# Allegro board rp2040miniboard.brd
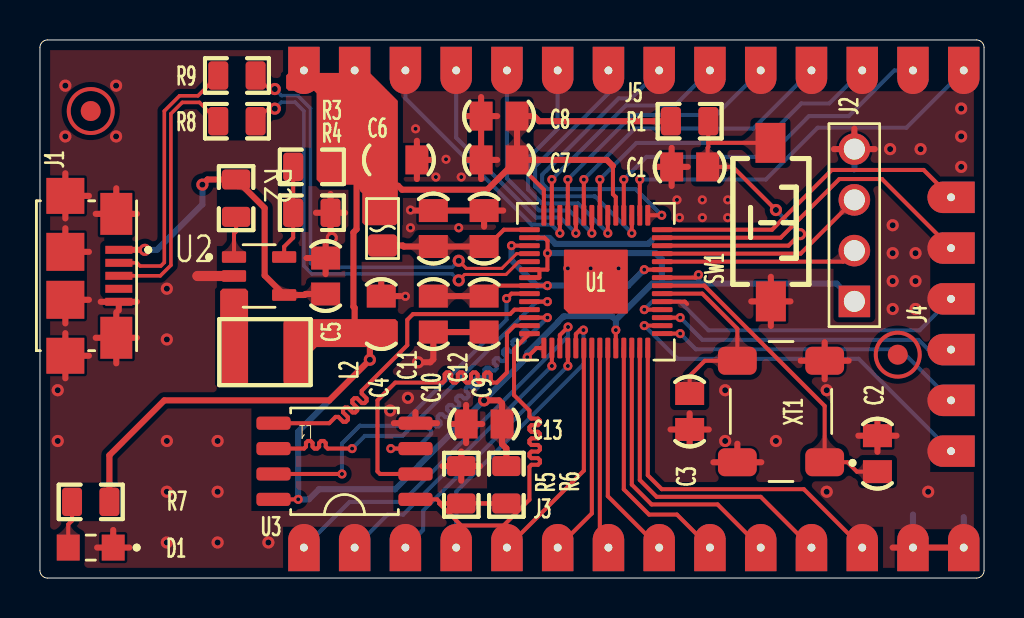
[diagram p0: board, top side]
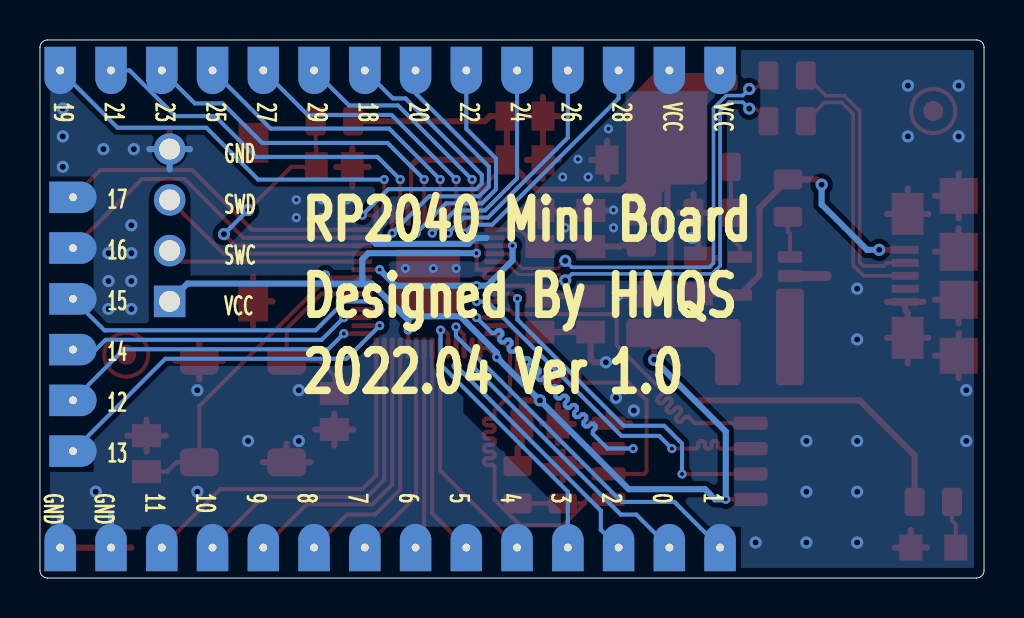
[diagram p1: board, bottom side, seen from below]

Outline 47.24 x 26.92 mm; copper layers: TOP, BOTTOM. Coordinates in mm from the lower left corner of the outline.
Outline path: 0,26.54 0,0.38 arc(0.11,0.11) 0.38,0 46.86,0 arc(47.13,0.11) 47.24,0.38 47.24,26.54 arc(47.13,26.81) 46.86,26.92 0.38,26.92 arc(0.11,26.81) 0,26.54

## Design rules (mm)
constraint set DEFAULT: min track width 0.203
net group DP_USB_D: nets USB_DM USB_DP
net group N31291: nets N31291
net group N31303: nets N31303
net group POWER: nets 1V1 5V ADC_AVDD VCC
net group QSPI: nets QSPI_SSN

## Placement (name value [footprint] x y rotation side)
C1  22pF  [CAPC2012X140N]  32.51 20.57 180 top
C2  22pF  [CAPC2012X140N]  41.91 6.22 270 top
C3  22pF  [CAPC2012X140N]  32.51 8.33 270 top
C4  10uF  [CAPC2012X140N]  17.08 13.21 270 top
C5  10uF  [CAPC2012X140N]  14.3 15.11 270 top
C6  100nF  [CAPC2012X140N]  17.96 20.92 0 top
C7  100nF  [CAPC2012X140N]  22.98 20.92 180 top
C8  100nF  [CAPC2012X140N]  22.98 23.11 180 top
C9  100nF  [CAPC2012X140N]  22.23 13.21 270 top
C10  1uF  [CAPC2012X140N]  19.69 13.21 270 top
C11  1uF  [CAPC2012X140N]  19.69 17.49 90 top
C12  100nF  [CAPC2012X140N]  22.23 17.49 90 top
C13  100nF  [CAPC2012X140N]  22.23 7.71 0 top
D1  RED  [LED_7012X1]  2.54 1.52 180 top
J1  MicroUSB  [HRS_ZX62-B-5PA33]  1.27 15.12 270 top
J2  4P  [HDRV4W64P254_4X1_1016X254H838]  40.76 13.84 90 top
J3  SHeader_14P  [STAMPHEADER_2R54_14P]  29.72 1.52 90 top
J4  SHeader_6P  [STAMPHEADER_2R54_6P]  45.59 12.7 180 top
J5  SHeader_14P  [STAMPHEADER_2R54_14P]  29.72 25.4 270 top
L1  1.5uH  [WNR3015]  11.26 11.3 180 top
L2  0R  [INDC2012X140N]  17.15 17.49 270 top
NOREF  -  [unnamed]  2.54 23.37 0 top
NOREF#2  -  [unnamed]  42.93 11.18 0 top
NOREF#3  -  [#2]  5.08 4.32 0 top
R1  10K 5%  [RESC2012X65N]  32.51 22.86 0 top
R2  4.7K 5%  [RESC2012X65N]  9.82 19.01 270 top
R3  6.81K 1%  [RESC2012X65N]  13.61 20.57 0 top
R4  1.5K 1%  [RESC2012X65N]  13.61 18.28 0 top
R5  4.7K 5%  [RESC2012X65N]  21.08 4.67 270 top
R6  4.7K 5%  [RESC2012X65N]  23.34 4.67 90 top
R7  4.7K 5%  [RESC2012X65N]  2.54 3.81 180 top
R8  27R 5%  [RESC2012X65N]  9.86 22.86 180 top
R9  27R 5%  [RESC2012X65N]  9.86 25.15 180 top
SW1  3x6x2R5_SW  [TSW_SMD-3_6_2_5]  36.58 17.78 270 top
U1  RP2040  [PQFN40P775X775X90-57N]  27.82 14.83 0 top
U2  JW5250S  [SOT95P280X145-5N]  10.97 15.11 0 top
U3  2MB Flash  [SOIC127P790X216-8N]  15.24 5.84 90 top
XT1  12MHz  [OSCSC700X508X180N]  37.08 8.33 180 top

## Library data of the parts
C1-C13 = Cap
D1 = LED
J1 = MicroUSB_10P
J2 = Header-4P
J3 J5 = Header-14P_0
J4 = Header-6P_0
L1 L2 = inductor
R1-R9 = RES
SW1 = Button_2P
U1 = rp2040
U2 = JW5250S
U3 = MX25L12835F
XT1 = 3225_13

## Footprints (pads in the part's own frame, mm; a bottom-side part is the same pattern mirrored in y, then rotated)
CAPC2012X140N
  rect 1.15x1.45 smd: 1(-0.9,0) 2(0.9,0)
HDRV4W64P254_4X1_1016X254H838
  rect 1.58x1.58 hole 1.05: 1(0,0)
  round 1.58 hole 1.05: 2(2.54,0) 3(5.08,0) 4(7.62,0)
HRS_ZX62-B-5PA33
  rect 0.4x1.35 smd: 1(-1.3,2.675) 2(-0.65,2.675) 3(0,2.675) 4(0.65,2.675) 5(1.3,2.675)
  rect 2.1x1.6 smd: SH1(-3.1,2.55) SH6(3.1,2.55)
  rect 1.8x1.9 smd: SH2(-4,0) SH5(4,0)
  rect 1.9x1.9 smd: SH3(-1.2,0) SH4(1.2,0)
INDC2012X140N
  rrect 1.115x1.465 smd: 1(-0.85,0) 2(0.85,0)
LED_7012X1
  rect 1.15x1.3 smd: A(1.125,0) C(-1.125,0)
OSCSC700X508X180N
  custom 1.94x1.4 smd: 1(-2.185,2.54) 2(-2.185,-2.54) 3(2.185,-2.54) 4(2.185,2.54)
PQFN40P775X775X90-57N
  rrect 0.25x1.035 smd: 1(-2.6,-3.322) 2(-2.2,-3.322) 3(-1.8,-3.322) 4(-1.4,-3.322) 5(-1,-3.322) 6(-0.6,-3.322) 7(-0.2,-3.322) 8(0.2,-3.322) 9(0.6,-3.322) 10(1,-3.322) 11(1.4,-3.322) 12(1.8,-3.322) 13(2.2,-3.322) 14(2.6,-3.322) 29(2.6,3.322) 30(2.2,3.322) 31(1.8,3.322) 32(1.4,3.322) 33(1,3.322) 34(0.6,3.322) 35(0.2,3.322) 36(-0.2,3.322) 37(-0.6,3.322) 38(-1,3.322) 39(-1.4,3.322) 40(-1.8,3.322) 41(-2.2,3.322) 42(-2.6,3.322)
  rrect 1.035x0.25 smd: 15(3.322,-2.6) 16(3.322,-2.2) 17(3.322,-1.8) 18(3.322,-1.4) 19(3.322,-1) 20(3.322,-0.6) 21(3.322,-0.2) 22(3.322,0.2) 23(3.322,0.6) 24(3.322,1) 25(3.322,1.4) 26(3.322,1.8) 27(3.322,2.2) 28(3.322,2.6) 43(-3.322,2.6) 44(-3.322,2.2) 45(-3.322,1.8) 46(-3.322,1.4) 47(-3.322,1) 48(-3.322,0.6) 49(-3.322,0.2) 50(-3.322,-0.2) 51(-3.322,-0.6) 52(-3.322,-1) 53(-3.322,-1.4) 54(-3.322,-1.8) 55(-3.322,-2.2) 56(-3.322,-2.6)
  custom 3.2x3.2 smd: 57(0,0)
RESC2012X65N
  custom 1x1.42 smd: 1(-0.935,0) 2(0.935,0)
SOIC127P790X216-8N
  rrect 0.659x1.709 smd: 1(-1.905,-3.553) 2(-0.635,-3.553) 3(0.635,-3.553) 4(1.905,-3.553) 5(1.905,3.553) 6(0.635,3.553) 7(-0.635,3.553) 8(-1.905,3.553)
SOT95P280X145-5N
  custom 1.21x0.58 smd: 1(-1.255,0.95) 2(-1.255,0) 3(-1.255,-0.95) 4(1.255,-0.95) 5(1.255,0.95)
STAMPHEADER_2R54_6P
  custom 2.362x1.575 hole 0.889: 1(0,6.35) 2(0,3.81) 3(0,1.27) 4(0,-1.27) 5(0,-3.81) 6(0,-6.35)
STAMPHEADER_2R54_14P
  custom 2.362x1.575 hole 0.889: 1(0,16.51) 2(0,13.97) 3(0,11.43) 4(0,8.89) 5(0,6.35) 6(0,3.81) 7(0,1.27) 8(0,-1.27) 9(0,-3.81) 10(0,-6.35) 11(0,-8.89) 12(0,-11.43) 13(0,-13.97) 14(0,-16.51)
TSW_SMD-3_6_2_5
  rect 2x1.5 smd: 1(-3.996,-0.02) 2(3.937,0)
unnamed
  round 1 smd: (0,0)
WNR3015
  rrect 1.219x3.048 smd: 1(-1.549,0) 2(1.549,0)

## Nets
1V1: C9.1 C10.1 U1.23 U1.45 U1.50
5V: C5.2 J1.1(\VBUS\) R2.1 U2.4(\VIN\)
GND: C1.2 C2.1 C3.2 C4.1 C5.1 C6.2 C7.2 C8.2 C9.2 C10.2 C11.2 C12.2 C13.1 D1.C(\C\) J1.5 J1.SH1 J1.SH2 J1.SH3 J1.SH4 J1.SH5 J1.SH6 J2.4 J3.13 J3.14 R4.2 R5.1 SW1.2 U1.19 U1.57 U2.2 U3.4 XT1.2 XT1.4
VCC: C4.2 C6.1 C7.1 C8.1 C13.2 J2.1 J5.13 J5.14 L1.1 L2.1 R1.1 R3.2 R6.2 R7.1 U1.1 U1.10 U1.22 U1.33 U1.42 U1.44 U1.48 U1.49 U3.8
ADC_AVDD: C11.1 C12.1 L2.2 U1.43
GPIO0: J3.2 U1.2
GPIO1: J3.1 U1.3
GPIO2: J3.3 U1.4
GPIO3: J3.4 U1.5
GPIO4: J3.5 U1.6
GPIO5: J3.6 U1.7
GPIO6: J3.7 U1.8
GPIO7: J3.8 U1.9
GPIO8: J3.9 U1.11
GPIO9: J3.10 U1.12
GPIO10: J3.11 U1.13
GPIO11: J3.12 U1.14
GPIO12: J4.2 U1.15
GPIO13: J4.1 U1.16
GPIO14: J4.3 U1.17
GPIO15: J4.4 U1.18
GPIO16: J4.5 U1.27
GPIO17: J4.6 U1.28
GPIO18: J5.7 U1.29
GPIO19: J5.1 U1.30
GPIO20: J5.8 U1.31
GPIO21: J5.2 U1.32
GPIO22: J5.9 U1.34
GPIO23: J5.3 U1.35
GPIO24: J5.10 U1.36
GPIO25: J5.4 U1.37
GPIO26: J5.11 U1.38
GPIO27: J5.5 U1.39
GPIO28: J5.12 U1.40
GPIO29: J5.6 U1.41
QSPI_SCLK: U1.52 U3.6
QSPI_SD0: U1.53 U3.5
QSPI_SD1: U1.55 U3.2
QSPI_SD2: U1.54 U3.3(\WP#/SIO2\)
QSPI_SD3: U1.51 U3.7
QSPI_SSN: R5.2 R6.1 U1.56 U3.1
RUN: C1.1 R1.2 SW1.1 U1.26
SWC: J2.2 U1.24
SWD: J2.3 U1.25
USB_DM: R9.1 U1.46
USB_DP: R8.1 U1.47
XIN: C3.1 U1.20 XT1.3(\OUT\)
XOUT: C2.2 U1.21(\XOUT\) XT1.1
N16757: R3.1 R4.1 U2.5
N16819: R2.2 U2.1
N16919: L1.2 U2.3
N24808: D1.A R7.2
N31291: J1.2 R9.2
N31303: J1.3 R8.2

Pads without a net: J1 4

## Via types
v1: diameter 0.457, hole 0.203, TOP to BOTTOM, 51 vias
v2: diameter 0.61, hole 0.305, TOP to BOTTOM, 47 vias

## Routing (per net, layer and track width the routed paths; a pad name or vN(x,y) marks a point on that pad's centre or on a via; arc(x,y) is an arc through that point)
1V1: length 16
  TOP w0.203: U1.23 v1(30.24,15.43) ; C9.1 22.75,14.63 U1.50 v1(25.39,14.63) ; U1.45 v1(23.6,16.63)
  TOP w0.305: C10.1 C9.1
  BOTTOM w0.305: v1(23.6,16.63) 23.6,15.89 24.86,14.63 v1(25.39,14.63) 29.44,14.63 v1(30.24,15.43)
5V: length 16.8
  TOP w0.305: v2(8.13,19.69) 8.39,19.94 R2.1 11.24,18.52 11.24,15.14 U2.4 13.24,14.16 13.29,14.21 C5.2 ; J1.1 v2(5.25,16.42)
  BOTTOM w0.305: v2(5.25,16.42) 5.86,16.42 8.13,18.69 v2(8.13,19.69)
GND: length 107
  TOP w0.203: 32.39,13.72 32.27,13.83 U1.19
  TOP w0.305: 3.04,13.82 J1.5 ; J1.5 3.94,13.39 ; J1.5 4.85,13.82 ; R5.1 21.08,6.33 ; R5.1 22.02,5.6 ; R5.1 20.14,5.6 ; R5.1 21.08,4.87 ; D1.C 4.47,1.52 ; D1.C 2.86,1.52 ; D1.C 3.66,2.4 ; 17.71,7.75 18.79,7.75 ; 18.79,7.75 19.88,7.75 ; 18.79,7.75 18.79,8.31 ; C1.2 32.42,20.57 ; C1.2 31.61,21.53 ; C1.2 31.61,19.62 ; C1.2 30.81,20.57 ; R4.2 14.54,19.22 ; R4.2 13.81,18.28 ; R4.2 15.27,18.28 ; R4.2 14.54,17.34 ; 21.33,6.75 C13.1 ; C13.1 21.33,8.66 ; C13.1 20.52,7.71 ; C13.1 22.13,7.71 ; J1.SH5 1.27,12.25 ; J1.SH5 2.45,11.12 ; J1.SH5 1.27,9.99 ; 39.74,21.46 J2.4 ; J2.4 41.77,21.46 ; J2.4 40.76,22.48 ; 3.82,10.74 J1.SH6 ; J1.SH6 3.82,13.3 ; J1.SH6 4.85,12.02 ; J1.SH6 2.79,12.02 ; 31.56,7.43 C3.2 ; C3.2 32.51,8.24 ; C3.2 32.51,6.63 ; C3.2 33.47,7.43 ; 1.27,17.99 J1.SH2 ; J1.SH2 2.45,19.12 ; J1.SH2 1.27,20.25 ; 21.27,20.92 C7.2 ; C7.2 C8.2 ; C7.2 22.08,19.97 ; C7.2 22.88,20.92 ; C8.2 22.08,24.07 ; C8.2 21.27,23.11 ; C8.2 22.88,23.11 ; C12.2 C11.2 18.73,18.39 ; C12.2 22.23,17.58 ; C12.2 23.18,18.39 ; 17.08,14.91 C4.1 18.03,14.11 ; XT1.2 40.47,10.87 ; XT1.2 39.27,11.8 ; XT1.2 39.27,9.94 ; XT1.2 38.07,10.87 ; 42.67,1.52 J3.13 ; J3.13 J3.14 ; J3.13 43.69,2.54 ; C2.1 42.86,7.12 ; C2.1 41.91,6.32 ; C2.1 41.91,7.93 ; C2.1 40.96,7.12 ; 33.7,5.79 XT1.4 ; XT1.4 34.9,6.72 ; XT1.4 36.1,5.79 ; 2.45,16.32 J1.SH3 1.27,17.5 ; 18.86,19.97 C6.2 ; C6.2 19.67,20.92 ; C6.2 18.86,21.88 ; 36.58,12.61 SW1.2 ; SW1.2 36.58,15.07 ; SW1.2 37.56,13.84 ; SW1.2 35.6,13.84 ; 2.79,18.22 J1.SH1 ; J1.SH1 4.85,18.22 ; J1.SH1 3.82,19.5 ; 14.3,15.21 C5.1 ; C5.1 13.34,16.01 ; C5.1 14.3,16.82 ; 1.27,12.74 J1.SH4 2.45,13.92 ; C9.2 C10.2 19.69,10.95 19.53,10.8 v2(18.92,10.8)
  TOP w0.508: U2.2 7.87,15.11
  BOTTOM w0.305: J3.13 43.69,3.18 ; 24.89,17.02 25.5,17.02 25.8,16.72 30.44,16.72 30.61,16.89 ; 40.76,20.44 J2.4 ; J2.4 41.77,21.46 ; J2.4 39.74,21.46 ; J3.14 46.23,3.05
  vias: v1(18.29,14.1) v1(18.54,18.42) v1(18.54,17.53) v1(18.8,22.48) v1(19.81,20.07) v1(20.32,20.96) v1(20.96,17.53) v1(21.08,20.07) v1(26.42,15.49) v1(27.56,15.49) v1(28.96,15.49) v1(31.88,18.92) v1(32,18.03) v1(33.15,18.92) v1(33.15,18.03) v1(34.42,18.92) v1(34.42,18.03) v2(0.89,9.4) v2(0.89,6.86) v2(1.27,24.64) v2(1.27,22.1) v2(3.81,24.64) v2(3.81,22.1) v2(6.35,14.48) v2(6.35,11.94) v2(6.35,6.86) v2(6.35,4.32) v2(6.35,1.78) v2(8.89,6.86) v2(8.89,4.32) v2(8.89,1.78) v2(11.43,1.78) v2(14.61,17.02) v2(17.53,8.38) v2(18.42,9.02) v2(34.29,9.4) v2(34.29,6.86) v2(36.83,6.86) v2(39.37,9.4) v2(39.37,4.32) v2(42.55,21.46) v2(42.67,17.65) v2(42.67,16.26) v2(42.67,14.86) v2(42.67,13.46) v2(43.82,16.26) v2(43.82,14.86) v2(43.82,13.46) v2(44.07,21.46) v2(44.45,4.32) v2(46.1,23.5) v2(46.1,22.1) v2(46.1,20.57)
VCC: length 121.6
  TOP w0.203: U1.42 25.22,19.43 23.87,20.77 C7.1 ; 24.99,15.43 24.99,15.03 U1.49 ; 24.99,15.43 25.39,15.43 25.39,16.25 v1(25.4,16.26) 25.4,16.87 25.24,17.03 U1.44 ; 24.99,15.43 U1.48 ; v1(24.38,11.05) 24.84,11.51 U1.1 ; U3.8 v1(12.92,3.94) ; U1.22 32.81,15.03 v1(32.96,15.18) ; U1.33 28.82,19.06 28.67,19.21 28.67,20.62 ; U1.10 v1(28.82,12.41)
  TOP w0.305: R7.1 3.47,6.14 6.22,8.89 14.48,8.89 v2(16.51,10.92) 16.51,11.74 C4.2 ; C7.1 C8.1 24.73,23.11 24.98,22.86 R1.1 ; C7.1 22.38,19.43 18.12,19.43 17.92,19.63 16.37,19.63 16.17,19.43 16.89,19.43 ; C7.1 28.37,20.92 28.67,20.62 ; J5.14 13.21,24.77 ; v2(22.23,8.89) 22.97,8.89 23.12,8.74 C13.2 23.12,6.7 23.34,6.49 R6.2 ; 15.75,12.07 15.75,13.52 15.69,13.58 15.69,17.29 15.84,17.45 15.84,20.1 15.75,20.19 ; J5.13 15.75,24.51
  BOTTOM w0.305: 31.12,14.73 30.63,14.73 28.82,12.92 ; 31.12,14.73 31.12,15.95 30.81,16.26 v1(25.4,16.26) ; 31.12,14.73 32.96,14.73 ; 28.82,12.92 28.64,13.1 26.21,13.1 25.93,12.82 25.93,12.81 24.38,11.27 v1(24.38,11.05) v2(22.23,8.89) 17.78,4.45 13.96,4.45 13.46,3.94 v1(12.92,3.94) 12.92,7.33 v2(16.51,10.92) ; 28.82,12.92 v1(28.82,12.41) ; J2.1 39.87,14.73 32.96,14.73 ; 32.96,14.73 v1(32.96,15.18)
ADC_AVDD: length 7.7
  TOP w0.203: 22.38,16.59 23.22,17.43 U1.43
  TOP w0.305: 22.38,16.59 C12.1 C11.1 18.21,16.59 18.16,16.64 L2.2
GPIO0: length 14.5
  TOP w0.203: U1.2 v1(25.62,10.61)
  BOTTOM w0.203: J3.2 17.4,3.18 18.18,3.18 v1(25.62,10.61)
GPIO1: length 19.3
  TOP w0.203: v1(26.43,12.56) 26.02,12.15 U1.3
  BOTTOM w0.203: J3.1 15.49,3.81 18.13,3.81 26.43,12.11 v1(26.43,12.56)
GPIO2: length 13.4
  TOP w0.203: U1.4 v1(26.42,10.61)
  BOTTOM w0.203: v1(26.42,10.61) 19.18,3.37 19.18,2.41 J3.3
GPIO3: length 14.7
  TOP w0.203: v1(27.2,12.41) 27.02,12.41 26.82,12.2 U1.5
  BOTTOM w0.203: v1(27.2,12.41) 27.2,10.69 20.83,4.32 J3.4
GPIO4: length 11.6
  TOP w0.203: J3.5 27.22,5.37 U1.6
GPIO5: length 10.7
  TOP w0.203: J3.6 27.62,3.23 U1.7
GPIO6: length 10.2
  TOP w0.203: U1.8 28.02,1.96 J3.7
GPIO7: length 11
  TOP w0.203: J3.8 28.42,4.09 U1.9
GPIO8: length 12.6
  TOP w0.203: U1.11 29.22,4.44 30.48,3.18 31.88,3.18 J3.9
GPIO9: length 14.6
  TOP w0.203: U1.12 29.62,4.67 30.61,3.68 33.91,3.68 J3.10
GPIO10: length 16.6
  TOP w0.203: U1.13 30.02,4.91 30.86,4.06 36.07,4.06 J3.11
GPIO11: length 18.6
  TOP w0.203: U1.14 30.42,5.14 31.12,4.45 38.23,4.45 J3.12
GPIO12: length 15.8
  TOP w0.203: U1.15 v1(32.04,12.23)
  BOTTOM w0.203: v1(32.04,12.23) 32.82,11.45 43.04,11.45 J4.2
GPIO13: length 18.9
  TOP w0.203: U1.16 v1(30.24,12.63)
  BOTTOM w0.203: J4.1 40.97,10.97 31.9,10.97 v1(30.24,12.63)
GPIO14: length 15.1
  TOP w0.203: U1.17 v1(32.04,13.03)
  BOTTOM w0.203: J4.3 44.45,11.43 43.96,11.92 33.15,11.92 v1(32.04,13.03)
GPIO15: length 17.7
  TOP w0.203: U1.18 v1(30.24,13.43)
  BOTTOM w0.203: J4.4 44.02,12.39 33.45,12.39 32,13.84 30.65,13.84 v1(30.24,13.43)
GPIO16: length 17.1
  TOP w0.203: J4.5 42.14,19.97 40,19.97 37.07,17.03 U1.27
GPIO17: length 16.3
  TOP w0.203: U1.28 36.64,17.43 39.62,20.42 44.22,20.42 J4.6
GPIO18: length 15.8
  TOP w0.203: U1.29 v1(31.12,18.15)
  BOTTOM w0.203: v1(31.12,18.15) 29.81,19.46 25.42,19.46 25.13,19.74 25.13,20.18 28.96,24 29.59,24 J5.7
GPIO19: length 20.3
  TOP w0.203: U1.30 v1(30.02,19.94)
  BOTTOM w0.203: v1(30.02,19.94) 36.32,19.94 38.92,22.53 43.36,22.53 J5.1
GPIO20: length 14
  TOP w0.203: U1.31 v1(29.62,17.25)
  BOTTOM w0.203: v1(29.62,17.25) 27.77,19.1 25.27,19.1 24.78,19.59 24.78,20.59 28.45,24.26 J5.8
GPIO21: length 18.5
  TOP w0.203: U1.32 v1(29.22,19.94)
  BOTTOM w0.203: v1(29.22,19.94) 30.35,21.07 36.44,21.07 38.48,23.11 40.47,23.11 42.76,25.4 J5.2
GPIO22: length 12.4
  TOP w0.203: U1.34 v1(28.42,17.25)
  BOTTOM w0.203: J5.9 25.91,22.48 24.42,20.99 24.42,19.45 25.12,18.75 26.93,18.75 v1(28.42,17.25)
GPIO23: length 17.2
  TOP w0.203: U1.35 v1(28.02,19.94)
  BOTTOM w0.203: v1(28.02,19.94) 29.85,21.77 36.12,21.77 38.1,23.75 39.5,23.75 J5.3
GPIO24: length 11.7
  TOP w0.203: U1.36 v1(27.62,17.25)
  BOTTOM w0.203: J5.10 23.37,20 24.98,18.39 26.48,18.39 v1(27.62,17.25)
GPIO25: length 15.4
  TOP w0.203: U1.37 v1(27.22,19.94)
  BOTTOM w0.203: v1(27.22,19.94) 29.76,22.49 35.7,22.49 J5.4
GPIO26: length 12.2
  TOP w0.203: U1.38 v1(26.82,17.25)
  BOTTOM w0.203: v1(26.82,17.25) 26.04,18.04 24.83,18.04 20.83,22.04 J5.11
GPIO27: length 13.7
  TOP w0.203: U1.39 v1(26.42,19.94)
  BOTTOM w0.203: J5.5 33.84,23.17 29.65,23.17 v1(26.42,19.94)
GPIO28: length 12.8
  TOP w0.203: U1.40 v1(26.02,17.25)
  BOTTOM w0.203: J5.12 18.29,24 24.61,17.68 25.59,17.68 v1(26.02,17.25)
GPIO29: length 12
  TOP w0.203: U1.41 v1(25.62,19.94)
  BOTTOM w0.203: v1(25.62,19.94) 29.32,23.65 31.78,23.65 J5.6
QSPI_SCLK: length 18.7
  TOP w0.203: U1.52 v1(25.39,13.83) ; v1(15.62,6.48) 14.4,6.48 14.3,6.57 14.3,6.76 14.2,6.86 14.07,6.86 13.97,6.76 13.97,6.57 13.87,6.48 13.74,6.48 13.64,6.57 13.64,6.76 13.54,6.86 13.41,6.86 13.31,6.76 13.31,6.57 13.21,6.48 U3.6
  BOTTOM w0.203: v1(25.39,13.83) 24.86,13.83 18.14,7.11 16.26,7.11 v1(15.62,6.48)
QSPI_SD0: length 18.5
  TOP w0.203: 11.69,7.75 14.48,7.75 14.79,8.06 14.93,8.06 15.18,7.82 15.31,7.82 15.41,7.92 15.41,8.05 15.16,8.3 15.16,8.43 15.26,8.53 15.4,8.53 15.64,8.29 15.78,8.29 15.88,8.38 15.88,8.52 15.63,8.76 15.63,8.9 15.73,9 15.87,9 16.11,8.75 16.25,8.75 16.34,8.85 16.34,8.99 16.1,9.23 16.1,9.37 18.38,11.65 18.38,12.92 18.67,13.21 23.53,13.21 23.75,13.43 U1.53
QSPI_SD1: length 19
  TOP w0.203: U3.2 17.02,5.21 16.89,5.33 16.89,8.89 17.78,9.78 20.15,9.78 20.25,9.88 20.25,10.19 20.35,10.29 20.48,10.29 20.58,10.19 20.58,9.88 20.68,9.78 20.81,9.78 20.91,9.88 20.91,10.19 21.01,10.29 21.14,10.29 21.24,10.19 21.24,9.88 21.34,9.78 21.47,9.78 21.57,9.88 21.57,10.19 21.67,10.29 21.8,10.29 21.9,10.19 21.9,9.88 22,9.78 22.13,9.78 22.23,9.88 22.23,10.19 22.33,10.29 22.46,10.29 22.56,10.19 22.56,9.88 22.66,9.78 22.86,9.78 23.37,10.29 23.37,12.25 23.75,12.63 U1.55
QSPI_SD2: length 18.8
  TOP w0.203: U3.3 v1(17.56,6.48) ; U1.54 v1(25.39,13.03)
  BOTTOM w0.203: v1(25.39,13.03) 24.62,12.26 24.48,12.26 24.35,12.4 24.21,12.4 24.11,12.3 24.11,12.16 24.25,12.02 24.25,11.89 24.15,11.79 24.02,11.79 23.88,11.93 23.74,11.93 23.64,11.83 23.64,11.7 23.78,11.56 23.78,11.42 23.69,11.32 23.55,11.32 23.41,11.46 23.27,11.46 23.18,11.37 23.18,11.23 23.32,11.09 23.32,10.95 23.22,10.86 23.08,10.86 22.94,11 22.81,11 22.71,10.9 22.71,10.76 22.85,10.62 22.85,10.49 22.75,10.39 22.61,10.39 22.48,10.53 22.34,10.53 22.24,10.43 22.24,10.29 22.38,10.16 22.38,10.02 22.28,9.92 22.15,9.92 22.01,10.06 21.87,10.06 21.77,9.96 21.77,9.83 21.91,9.69 21.91,9.55 21.82,9.45 21.68,9.45 21.54,9.59 21.4,9.59 21.31,9.5 21.31,9.36 21.45,9.22 21.45,9.08 21.35,8.99 21.21,8.99 21.07,9.13 20.94,9.13 20.84,9.03 20.84,8.89 20.98,8.75 20.98,8.62 20.88,8.52 20.75,8.52 20.61,8.66 20.47,8.66 20.37,8.56 20.37,8.42 20.51,8.29 20.51,8.15 20.41,8.05 20.28,8.05 20.14,8.19 20,8.19 19.91,8.09 19.91,7.96 20.04,7.82 20.04,7.68 19.95,7.58 19.81,7.58 19.67,7.72 19.54,7.72 19.44,7.63 19.44,7.49 19.58,7.35 19.58,7.21 18.84,6.48 v1(17.56,6.48)
QSPI_SD3: length 18.1
  TOP w0.203: U1.51 23.6,14.23 v1(23.35,13.99) ; U3.7 v1(15.11,5.21)
  BOTTOM w0.203: v1(15.11,5.21) 15.11,6.73 16,7.62 18.03,7.62 23.35,12.94 v1(23.35,13.99)
QSPI_SSN: length 25.7
  TOP w0.203: U3.1 19.88,3.94 20.08,3.73 R5.2 R6.1 19.98,3.73 21.08,2.63 23.2,2.63 24.49,3.92 24.49,5.57 24.59,5.67 24.92,5.67 25.02,5.76 25.02,5.9 24.92,6 24.59,6 24.49,6.09 24.49,6.23 24.59,6.33 24.92,6.33 25.02,6.42 25.02,6.56 24.92,6.66 24.59,6.66 24.49,6.75 24.49,6.89 24.59,6.99 24.92,6.99 25.02,7.08 25.02,7.22 24.92,7.32 24.59,7.32 24.49,7.41 24.49,7.55 24.59,7.65 24.92,7.65 25.02,7.74 25.02,7.88 24.92,7.98 24.59,7.98 24.49,8.07 24.49,8.38 23.72,9.15 23.72,11.46 U1.56
RUN: length 18.6
  TOP w0.203: R1.2 33.45,21.78 ; 33.45,21.78 33.45,21.56 33.41,21.53 C1.1 34.67,20.57 v2(36.83,18.42) ; 33.45,21.78 SW1.1 ; U1.26 37.46,16.63 v2(38.04,17.21)
  BOTTOM w0.203: v2(36.83,18.42) v2(38.04,17.21)
SWC: length 9.8
  TOP w0.203: J2.2 40.2,15.83 U1.24
SWD: length 10.7
  TOP w0.203: J2.3 38.06,16.23 U1.25
USB_DM: length 22.8
  TOP w0.152: v2(11.75,24.47) 11.47,24.47 R9.1 ; U1.46 23.85,16.23 23.11,15.49 21.34,15.49 v2(20.96,15.88)
  BOTTOM w0.178: v2(11.75,24.47) 12.08,24.14 12.9,24.14 13.54,23.5 13.54,15.76 13.75,15.55 20.63,15.55 v2(20.96,15.88)
USB_DP: length 22.7
  TOP w0.152: v2(20.96,14.89) 21.25,15.19 23.32,15.19 23.97,15.83 U1.47 ; R8.1 11.42,23.49 v2(11.75,23.49)
  BOTTOM w0.178: v2(20.96,14.89) 20.63,15.22 13.61,15.22 13.21,15.62 13.21,23.37 12.76,23.81 12.08,23.81 v2(11.75,23.49)
XIN: length 9.7
  TOP w0.203: U1.20 33.14,14.23 34.9,12.48 XT1.3 33.27,10.87 32.51,10.11 C3.1
XOUT: length 16.3
  TOP w0.203: U1.21 33.25,14.63 39.27,8.61 XT1.1 40.41,5.79 40.88,5.32 C2.2
N16757: length 4.7
  TOP w0.203: R3.1 R4.1 12.67,17.03 12.22,16.58 U2.5
N16819: length 2.1
  TOP w0.203: R2.2 9.82,17.34 9.71,17.24 U2.1
N24808: length 2.4
  TOP w0.203: D1.A 1.42,2.68 1.61,2.87 R7.2
N31291: length 13.4
  TOP w0.178: R9.2 7.91,24.13 6.99,24.13 6.22,23.37 6.22,15.79 6.05,15.61 5.01,15.61 4.85,15.77 J1.2
N31303: length 13.4
  TOP w0.178: R8.2 7.98,23.8 7.12,23.8 6.55,23.23 6.55,15.65 6.02,15.12 J1.3

## Copper pours and planes (outline as drawn; the poured copper is in the pictures)
GND on TOP: 0.51,26.42 46.74,26.42 46.74,0.51 0.51,0.51 ; 16 cut-outs
GND on BOTTOM: 0.51,26.42 46.74,26.42 46.74,0.51 0.51,0.51 ; 17 cut-outs
VCC on TOP (solid shape): 17.91,12.83 17.91,11.68 17.78,11.56 13.84,11.56 13.46,11.18 13.46,9.78 13.34,9.65 12.32,9.65 12.19,9.78 12.19,12.83 12.32,12.95 17.78,12.95
VCC on TOP (solid shape): 17.91,23.88 17.91,17.78 17.78,17.65 16.26,17.65 16.13,17.78 16.13,19.3 15.75,19.69 14.1,19.69 13.84,19.94 13.84,24.26 13.72,24.38 12.45,24.38 12.32,24.51 12.32,25.15 12.45,25.27 16.51,25.27
Net_1 on TOP (solid shape): 44.13,11.13 44.12,11.03 44.1,10.93 44.08,10.84 44.05,10.75 44.01,10.66 43.96,10.57 43.91,10.49 43.85,10.41 43.78,10.34 43.71,10.27 43.64,10.21 43.55,10.15 43.47,10.11 43.38,10.06 43.29,10.03 43.19,10.01 43.1,9.99 43,9.98 42.9,9.98 42.8,9.98 42.71,10 42.61,10.02 42.52,10.05 42.43,10.08 42.34,10.13 42.26,10.18 42.18,10.24 42.1,10.3 42.04,10.37 41.97,10.45 41.92,10.53 41.87,10.61 41.82,10.7 41.79,10.79 41.76,10.89 41.74,10.98 41.73,11.08 41.73,11.18 41.73,11.22 41.93,11.22 41.93,11.13 41.93,11.04 41.95,10.95 41.97,10.87 42.01,10.78 42.04,10.7 42.09,10.62 42.14,10.55 42.2,10.48 42.27,10.42 42.34,10.37 42.41,10.32 42.49,10.27 42.57,10.24 42.66,10.21 42.75,10.19 42.84,10.18 42.93,10.18 43.02,10.18 43.1,10.19 43.19,10.21 43.28,10.24 43.36,10.27 43.44,10.32 43.51,10.37 43.58,10.42 43.65,10.48 43.71,10.55 43.76,10.62 43.81,10.7 43.85,10.78 43.88,10.87 43.9,10.95 43.92,11.04 43.93,11.13 43.93,11.22 43.92,11.31 43.9,11.4 43.88,11.49 43.85,11.57 43.81,11.65 43.76,11.73 43.71,11.8 43.65,11.87 43.58,11.93 43.51,11.99 43.44,12.03 43.36,12.08 43.28,12.11 43.19,12.14 43.1,12.16 43.02,12.17 42.93,12.18 42.84,12.17 42.75,12.16 42.66,12.14 42.57,12.11 42.49,12.08 42.41,12.03 42.34,11.99 42.27,11.93 42.2,11.87 42.14,11.8 42.09,11.73 42.04,11.65 42.01,11.57 41.97,11.49 41.95,11.4 41.93,11.31 41.93,11.22 41.73,11.22 41.73,11.27 41.74,11.37 41.76,11.47 41.79,11.56 41.82,11.65 41.87,11.74 41.92,11.82 41.97,11.91 42.04,11.98 42.1,12.05 42.18,12.11 42.26,12.17 42.34,12.22 42.43,12.27 42.52,12.3 42.61,12.33 42.71,12.36 42.8,12.37 42.9,12.38 43,12.37 43.1,12.36 43.19,12.35 43.29,12.32 43.38,12.29 43.47,12.25 43.55,12.2 43.64,12.14 43.71,12.08 43.78,12.02 43.85,11.94 43.91,11.87 43.96,11.78 44.01,11.7 44.05,11.61 44.08,11.51 44.1,11.42 44.12,11.32 44.13,11.22
Net_2 on TOP (solid shape): 3.74,23.32 3.73,23.22 3.72,23.12 3.69,23.03 3.66,22.94 3.62,22.85 3.58,22.76 3.52,22.68 3.46,22.6 3.4,22.53 3.33,22.46 3.25,22.4 3.17,22.35 3.08,22.3 2.99,22.26 2.9,22.22 2.81,22.2 2.71,22.18 2.61,22.17 2.52,22.17 2.42,22.17 2.32,22.19 2.23,22.21 2.13,22.24 2.04,22.28 1.95,22.32 1.87,22.37 1.79,22.43 1.72,22.49 1.65,22.56 1.59,22.64 1.53,22.72 1.48,22.8 1.44,22.89 1.4,22.98 1.38,23.08 1.36,23.17 1.34,23.27 1.34,23.37 1.34,23.41 1.54,23.41 1.54,23.32 1.55,23.23 1.56,23.15 1.59,23.06 1.62,22.97 1.66,22.89 1.71,22.82 1.76,22.74 1.82,22.68 1.88,22.61 1.95,22.56 2.03,22.51 2.11,22.47 2.19,22.43 2.27,22.4 2.36,22.38 2.45,22.37 2.54,22.37 2.63,22.37 2.72,22.38 2.81,22.4 2.89,22.43 2.97,22.47 3.05,22.51 3.13,22.56 3.2,22.61 3.26,22.68 3.32,22.74 3.37,22.82 3.42,22.89 3.46,22.97 3.49,23.06 3.52,23.15 3.53,23.23 3.54,23.32 3.54,23.41 3.53,23.5 3.52,23.59 3.49,23.68 3.46,23.76 3.42,23.84 3.37,23.92 3.32,23.99 3.26,24.06 3.2,24.12 3.13,24.18 3.05,24.23 2.97,24.27 2.89,24.3 2.81,24.33 2.72,24.35 2.63,24.36 2.54,24.37 2.45,24.36 2.36,24.35 2.27,24.33 2.19,24.3 2.11,24.27 2.03,24.23 1.95,24.18 1.88,24.12 1.82,24.06 1.76,23.99 1.71,23.92 1.66,23.84 1.62,23.76 1.59,23.68 1.56,23.59 1.55,23.5 1.54,23.41 1.34,23.41 1.34,23.47 1.36,23.56 1.38,23.66 1.4,23.75 1.44,23.84 1.48,23.93 1.53,24.02 1.59,24.1 1.65,24.17 1.72,24.24 1.79,24.31 1.87,24.36 1.95,24.42 2.04,24.46 2.13,24.5 2.23,24.53 2.32,24.55 2.42,24.56 2.52,24.57 2.61,24.57 2.71,24.56 2.81,24.54 2.9,24.51 2.99,24.48 3.08,24.44 3.17,24.39 3.25,24.34 3.33,24.28 3.4,24.21 3.46,24.14 3.52,24.06 3.58,23.98 3.62,23.89 3.66,23.8 3.69,23.71 3.72,23.61 3.73,23.51 3.74,23.42
N16919 on TOP (solid shape): 10.41,14.35 10.41,9.78 10.29,9.65 9.14,9.65 9.02,9.78 9.02,14.35 9.14,14.48 10.29,14.48

Small or netless copper shapes (teardrops, artwork), in the pictures only: 135 on TOP, 40 on BOTTOM

## Text on the board
Ref Des/Silkscreen Bottom: GND | SWD | SWC | VCC | 17 | 16 | 15 | 14 | 12 | 13 | 1 | 0 | 28 | 2 | 26 | 3 | 24 | 4 | 22 | 5 | 20 | 6 | 18 | 7 | 29 | 8 | 27 | 9 | 25 | 10 | 23 | 11 | 21 | 19 | RP2040 Mini Board | Designed By HMQS | 2022.04 Ver 1.0
Ref Des/Assembly Top: 1 | 0
PLACE_BOUND_TOP: FIGURE | FINISHED_SIZE | 8.0 | 12.0 | 35.0 | 41.34 | DRILL CHART: TOP to BOTTOM | ALL UNITS ARE IN MILS | PLATED | QTY | 51 | 47 | 68 | 4
